# EAGLE board powersupply (EAGLE 9.2.2)
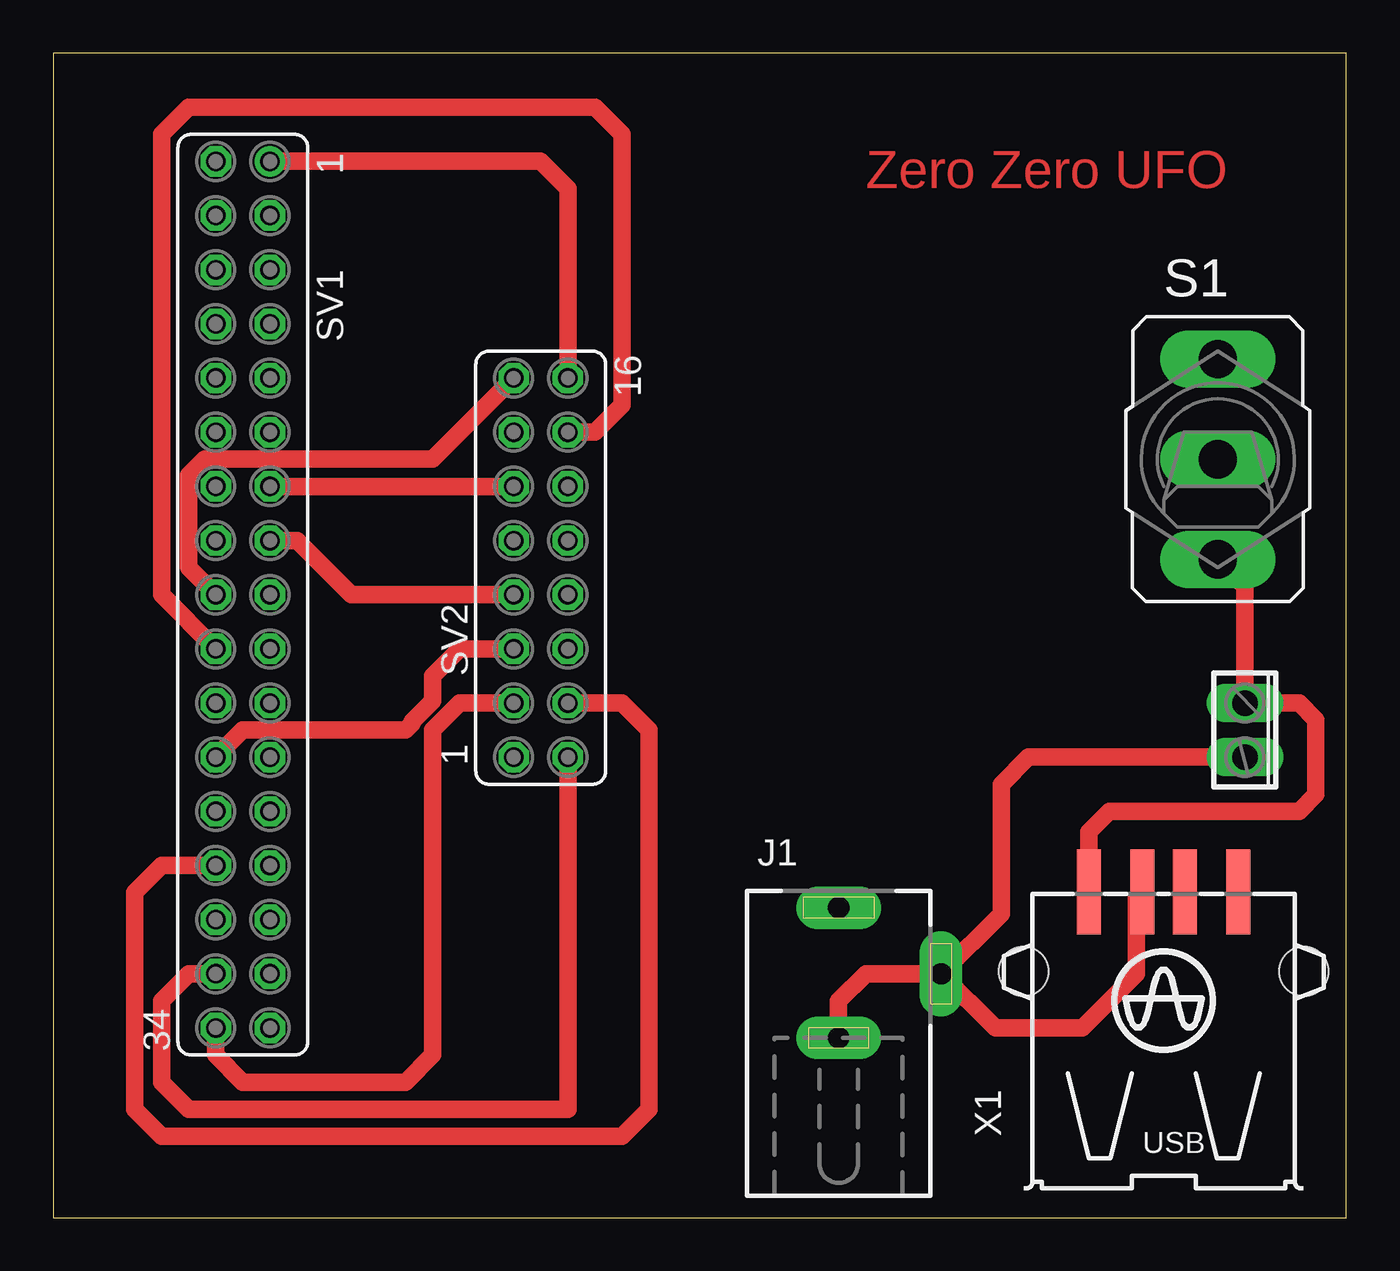
[diagram p0: board, top side]
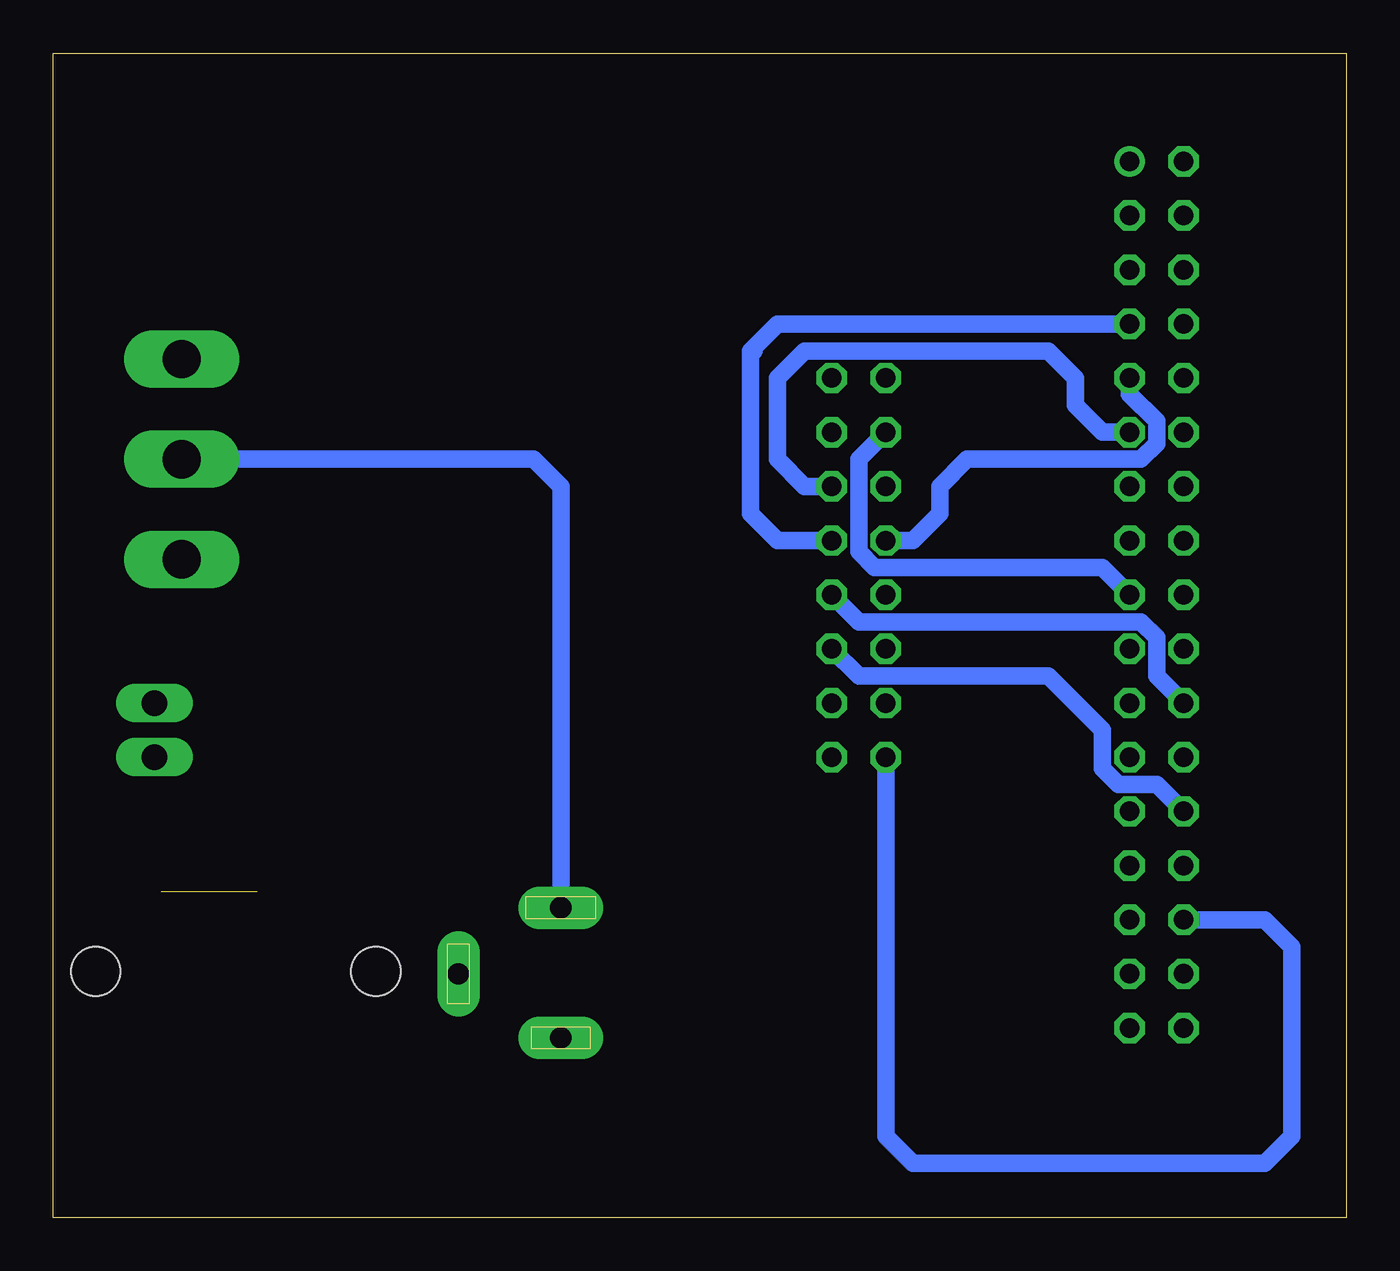
[diagram p1: board, bottom side, seen from below]

Size 60.63 x 54.6 mm. Coordinates in mm from the lower left corner, seen from the top.
Outline: 0,0 60.63,0 60.63,54.6 0,54.6 0,0
Copper layers (1*16): Top 0.035mm / dielectric 1.5mm / Bottom 0.035mm
Design rules "default": minimum track width 6mil, minimum drill 0.35mm, track to track 6mil, track to pad 6mil, pad to pad 6mil, via to via 6mil, smd to smd 6mil, copper to edge 40mil, drill to drill 6mil, minimum pad ring 10mil, minimum via ring 8mil, stop-mask expansion 4mil, vias tented up to drill 0mil, thermal gap 10mil

## Footprints (pad centres in the part's own frame; a part is rotated, then mirrored left to right if it is on the bottom)
DCJ0202 = drill 1 pad 2 long: 1 0,3.1; 2 4.8,0; 3 0,-3
2POL254 = drill 1.2 long: 1 -1.27,0; 2 1.27,0
M9040P = drill 1.803 long: 1 0,4.699; 2 0,0; 3 0,-4.699
FE17-2 = drill 0.914: 1 -20.32,1.27 | drill 0.914 octagon: 2 -20.32,-1.27; 3 -17.78,1.27; 4 -17.78,-1.27; 5 -15.24,1.27; 6 -15.24,-1.27; 7 -12.7,1.27; 8 -12.7,-1.27; 9 -10.16,1.27; 10 -10.16,-1.27; 11 -7.62,1.27; 12 -7.62,-1.27; 13 -5.08,1.27; 14 -5.08,-1.27; 15 -2.54,1.27; 16 -2.54,-1.27; 17 0,1.27; 18 0,-1.27; 19 2.54,1.27; 20 2.54,-1.27; 21 5.08,1.27; 22 5.08,-1.27; 23 7.62,1.27; 24 7.62,-1.27; 25 10.16,1.27; 26 10.16,-1.27; 27 12.7,1.27; 28 12.7,-1.27; 29 15.24,1.27; 30 15.24,-1.27; 31 17.78,1.27; 32 17.78,-1.27; 33 20.32,1.27; 34 20.32,-1.27
FE08-2 = drill 0.914 octagon: 1 -8.89,1.27; 2 -8.89,-1.27; 3 -6.35,1.27; 4 -6.35,-1.27; 5 -3.81,1.27; 6 -3.81,-1.27; 7 -1.27,1.27; 8 -1.27,-1.27; 9 1.27,1.27; 10 1.27,-1.27; 11 3.81,1.27; 12 3.81,-1.27; 13 6.35,1.27; 14 6.35,-1.27; 15 8.89,1.27; 16 8.89,-1.27
USB-A003 = smd 1.12 x 4: 1 -3.5,14; 2 -1,14; 3 1,14; 4 3.5,14 | hole 2.3: -6.57,10.28; 6.57,10.28

## Placement (x,y rotation side)
J1  DCJ0202  [DCJ0202]  36.83,11.43 0 top
PHOENIX1  [2POL254]  55.88,22.86 270 top
S1  [M9040P]  54.61,35.56 0 top
SV1  [FE17-2]  8.89,29.21 270 top
SV2  [FE08-2]  22.86,30.48 90 top
X1  [USB-A003]  52.07,1.27 0 top

## Library data of the parts
J1 = con-jack; OC_FARNELL: unknown; OC_NEWARK: unknown
PHOENIX1 = con-phoenix-254; OC_FARNELL: unknown; OC_NEWARK: unknown
S1 = switch
SV1 SV2 = con-lsta; OC_FARNELL: unknown; OC_NEWARK: unknown
X1 = con-yamaichi; OC_FARNELL: unknown; OC_NEWARK: unknown

## Nets
GND: J1.2 J1.3 PHOENIX1.2 X1.2 X1.3 X1.4
N$1: J1.1 S1.2
N$2: PHOENIX1.1 S1.3 X1.1
N$3: SV1.1 SV2.16
N$4: SV1.7 SV2.10
N$5: SV1.9 SV2.9
N$6: SV1.11 SV2.12
N$7: SV1.13 SV2.11
N$8: SV1.15 SV2.7
N$9: SV1.17 SV2.13
N$10: SV1.34 SV2.3
N$11: SV1.32 SV2.2
N$12: SV1.30 SV2.1
N$13: SV1.28 SV2.4
N$14: SV1.26 SV2.6
N$15: SV1.24 SV2.5
N$16: SV1.22 SV2.8
N$17: SV1.20 SV2.14
N$18: SV1.18 SV2.15

## Tracks (layer width: path | path; a pad name or v marks a point on that pad's centre or on a via)
GND  (2 unrouted)
  Top 0.813: J1.2 44.45,14.25 44.45,20.32 45.72,21.59 PHOENIX1.2 57.15,21.59 | X1.2 50.8,15 50.8,11.43 48.26,8.89 44.17,8.89 J1.2 | J1.3 36.83,10.16 38.1,11.43 J1.2
  Top 1.27: J1.2 41.91,11.71
  Bottom 1.27: J1.2 41.63,11.64 41.42,11.43
N$1
  Bottom 0.813: J1.1 36.83,34.29 38.1,35.56 S1.2
N$2
  Top 0.813: S1.3 55.88,29.59 PHOENIX1.1 58.42,24.13 59.21,23.34 59.21,19.84 58.42,19.05 49.53,19.05 48.57,18.09 X1.1
N$3
  Top 0.813: SV1.1 22.86,49.53 24.13,48.26 SV2.16
N$4
  Bottom 0.813: SV1.7 26.67,41.91 27.78,40.8 | 27.78,40.8 27.78,40.64 | 27.78,40.8 27.94,40.64 27.94,33.02 26.67,31.75 SV2.10
N$5
  Bottom 0.813: SV1.9 10.16,38.63 8.89,37.36 8.89,36.3 9.63,35.56 17.78,35.56 19.05,34.29 19.05,33.02 20.32,31.75 SV2.9
N$6
  Bottom 0.813: SV2.12 25.4,34.29 26.67,35.56 26.67,39.37 25.4,40.64 13.97,40.64 12.7,39.37 12.7,38.1 11.43,36.83 SV1.11
N$7
  Top 0.813: SV1.13 SV2.11
N$8
  Top 0.813: SV1.15 11.43,31.75 13.97,29.21 SV2.7
N$9
  Bottom 0.813: SV2.13 22.86,35.56 22.86,31.22 22.12,30.48 11.43,30.48 SV1.17
N$10
  Top 0.813: SV1.34 7.62,7.62 8.89,6.35 16.51,6.35 17.78,7.62 17.78,22.86 19.05,24.13 SV2.3
N$11
  Top 0.813: SV2.2 24.13,5.08 6.35,5.08 5.08,6.35 5.08,10.16 6.35,11.43 SV1.32
N$12
  Bottom 0.813: SV2.1 21.59,3.81 20.32,2.54 3.81,2.54 2.54,3.81 2.54,12.7 3.81,13.97 SV1.30
N$13
  Top 0.813: SV2.4 26.67,24.13 27.94,22.86 27.94,5.08 26.67,3.81 5.08,3.81 3.81,5.08 3.81,15.24 5.08,16.51 SV1.28
N$14
  Bottom 0.813: SV2.6 22.86,25.4 13.97,25.4 11.43,22.86 11.43,21.06 10.69,20.32 8.89,20.32 SV1.26
N$15
  Top 0.813: SV1.24 8.89,22.86 16.51,22.86 16.82,23.16 16.82,23.26 17.78,24.23 17.78,25.4 19.05,26.67 SV2.5
N$16
  Bottom 0.813: SV1.22 8.89,25.4 8.89,27.2 9.63,27.94 22.86,27.94 SV2.8
N$17
  Top 0.813: SV1.20 5.08,29.21 5.08,50.8 6.35,52.07 25.4,52.07 26.67,50.8 26.67,38.1 25.4,36.83 SV2.14
N$18
  Top 0.813: SV2.15 17.78,35.56 7.09,35.56 6.35,34.82 6.35,30.48 SV1.18

## Text on the board
Top: Zero Zero UFO